# Altium PCB PCB_Design.PcbDoc
Units mil, origin at the board's own origin, x right, y up, seen from the top; angles counter-clockwise.
Board outline 2400 x 690 mil, 2 copper layers (Top Layer, Bottom Layer); 17 components, 10 nets, 36 pads, 0 vias.
Unrouted connection lines stored in the file: 17.
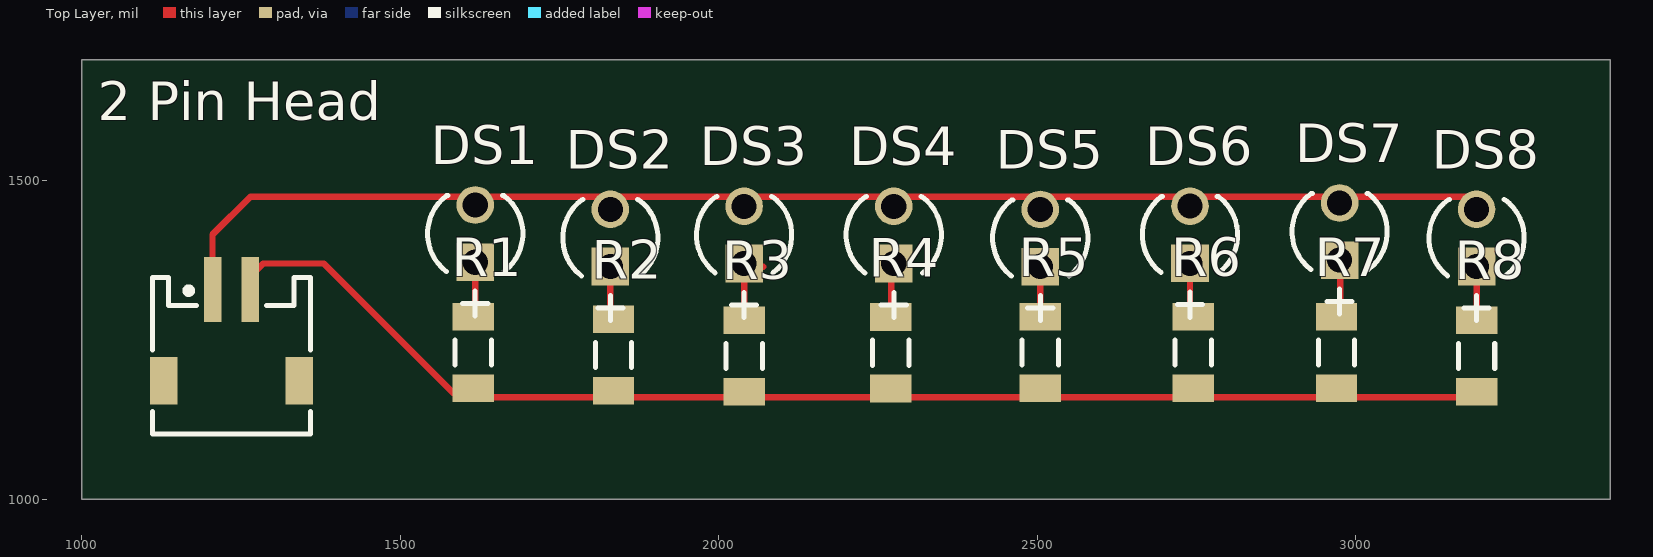
[diagram p0: Top Layer view]
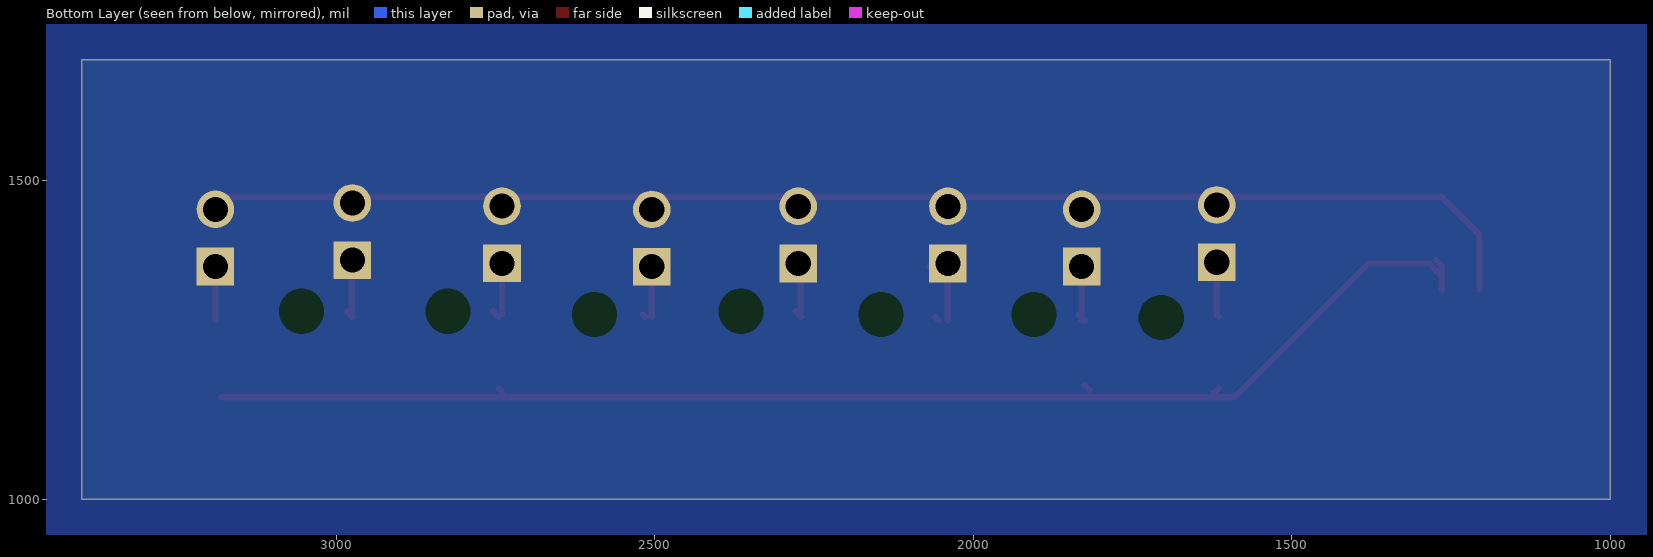
[diagram p1: Bottom Layer view, seen from below]

## Layer stack, top to bottom
Top Solder: solder mask 0.4, Solder Resist, Dk 3.5
Top Layer: signal copper 1.4
Dielectric 1: dielectric 12.6, FR-4, Dk 4.8
Bottom Layer: signal copper 1.4
Bottom Solder: solder mask 0.4, Solder Resist, Dk 3.5

## Board outline
1000,1000 3400,1000 3400,1690 1000,1690

## Design rules (kind name [scope] priority, off if disabled: settings)
Clearance [All] p1: gap=10 ignorepadtopadclearanceinfootprint=FALSE except(0: Arc-Hole Track-Hole SMDPad-Hole THPad-Hole Via-Hole Fill-Hole Poly-Hole Region-Hole Text-Hole)
PolygonConnect [All] p1: connectstyle=Relief reliefconductorwidth=10 reliefentries=4 polygonreliefangle="90 Angle" airgapwidth=10
RoutingVias [All] p1: holewidth=28 width=50 viastyle="Through Hole" minholewidth=28 minwidth=50 maxholewidth=28 maxwidth=50
SolderMaskExpansion [All] p1: expansion=4 istentingtop=FALSE
Width [All] p1: maxlimit=10 minlimit=10 preferedwidth=10
30 further rules are at their usual default settings.

## Classes and differential pairs
component class BrakeLight_Schematic: "2 Pin Head" DS8 R8

## Components (designator, comment, footprint, x,y, rotation, side; value= is the part's Value field where it differs from the comment)
"2 Pin Head" "648102131822" 648102131822 1235,1225 r0 top
DS1 "304090041.0" LED-2P-2.28-3MM_A 1617.88,1416.86 r90 top
DS2 "304090041.0" LED-2P-2.28-3MM_A 1830,1410.12 r90 top
DS3 "304090041.0" LED-2P-2.28-3MM_A 2040,1414.88 r90 top
DS4 "304090041.0" LED-2P-2.28-3MM_A 2275,1414.88 r90 top
DS5 "304090041.0" LED-2P-2.28-3MM_A 2505,1410 r90 top
DS6 "304090041.0" LED-2P-2.28-3MM_A 2740,1415.12 r90 top
DS7 "304090041.0" LED-2P-2.28-3MM_A 2975,1420.12 r90 top
DS8 "304090041.0" LED-2P-2.28-3MM_A 3190,1410.12 r90 top
R1 "ERJ-8GEY0R00V" RESC3216X70X50NL05T20 1615,1230 r270 top
R2 "ERJ-8GEY0R00V" RESC3216X70X50NL05T20 1835,1226.1 r270 top
R3 "ERJ-8GEY0R00V" RESC3216X70X50NL05T20 2040,1225 r270 top
R4 "ERJ-8GEY0R00V" RESC3216X70X50NL05T20 2270,1229.88 r270 top
R5 "ERJ-8GEY0R00V" RESC3216X70X50NL05T20 2505,1230 r270 top
R6 "ERJ-8GEY0R00V" RESC3216X70X50NL05T20 2745,1230 r270 top
R7 "ERJ-8GEY0R00V" RESC3216X70X50NL05T20 2970,1230 r270 top
R8 "ERJ-8GEY0R00V" RESC3216X70X50NL05T20 3190,1225 r270 top

## Footprints (in the part's own frame and the unit in brackets; to place one, negate y for a bottom-side part, rotate by r counter-clockwise, add the part's x,y. Pads: shape width x height; smd on the part's side, far side on the other; paste and mask are expansions set on the pad)
648102131822 [mm] "1.50mm SMT Male Horizontal Shrouded Header, 2p"
  rect 0.7x2.6 smd: 1(-0.75,2.65) 2(0.75,2.65)
  rect 1.1x1.9 smd: MP1(-2.7,-1) MP2(2.7,-1)
  silkscreen extent -3.15,-3.13 3.15,3.13, body extent -3.1,-3 3.1,3.47, height 3.74
LED-2P-2.28-3MM_A [mm] "LED, 2-Leads, Dia 3mm, Pitch 2.28mm"
  rect 1.5x1.5 hole 1: 1(-1.14,0)
  round 1.5 hole 1: 2(1.14,0)
  silkscreen extent -3.29,-1.9 1.52,1.9, body extent -1.9,-1.91 1.52,1.91, height 5.3
RESC3216X70X50NL05T20 [mm] "Chip Resistor, 2-Leads, Body 3.20x1.60mm, IPC Medium Density"
  rect 1.1x1.65 smd: 1(-1.425,0) 2(1.425,0)
  silkscreen extent -0.5,-0.72 0.5,0.72, body extent -1.63,-0.82 1.62,0.82, height 0.7

## Part data
"2 Pin Head": library part CMP-1502-00730-2, Color="Beige, White", Contact Resistance=20mΩ, Current Rating=1A, Flammability Rating="UL94 V-0", Insulation Resistance=500MΩ, Max Operating Temperature=85°C, Min Operating Temperature=-25°C, Operating Supply Voltage=50V, Connector Type="Male Pin", Contact Gender=Male, Contact Material=Copper, Contact Plating=Tin, Gender=Male, Height=3.7mm, Housing Material=Nylon, Insulation=Insulated, Lead Pitch=1.5mm, Length=6mm, Mount="Surface Mount", NexarPartId=18818251, Number of Contacts=2, Number of Pins=2, Number of Positions=2, Number of Rows=1, Packaging="Tape and Reel", Pitch=1.5mm, REACH SVHC=Unknown, RoHS=Compliant, Termination=SMD/SMT, Voltage Rating=50V, Width=6mm
DS1 DS2 DS3 DS4 DS5 DS6 DS7 DS8: library part CMP-2100-03574-1, "Red LED, 1.9 to 2.4 V, -25 to 85 degC, 2-Pin THD", Manufacturer="Shenzhen CGX", Package Description="2-Pin Through Hole Device, Dia 3 mm, Pitch 2.28 mm", Datasheet URL=http://datasheet.octopart.com/304090041-Chengguangxing-datasheet-62330656.pdf, Datasheet Version=41883.0, Manufacturer URL=http://szcgx.com/, Package Reference=304090041.0
R1 R2 R3 R4 R5 R6 R7 R8: library part CMP-2003-00541-1, Manufacturer=Panasonic, Part Number=ERJ-8GEY0R00V

## Nets (pads, with @x,y where several pads share a name; then routed paths per layer and width w, separated by ;. In a path a pad name is that pad's centre, name@x,y a point inside that pad or via, vN(x,y) a via of type N, cw(c..) or ccw(c..) an arc to the next point about the centre after c; other vN are vias at no path point)
GND: "2 Pin Head.1" DS1.2 DS2.2 DS3.2 DS4.2 DS5.2 DS6.2 DS7.2 DS8.2 | length 51.5
  Top Layer w10: 1205.47,1329.33 1205.47,1366.73 ; DS5.2@2500,1459.88 DS5.2 ; DS6.2 DS6.2@2745,1465
"Net2 Pin Head_2": "2 Pin Head.2" R1.2 R2.2 R3.2 R4.2 R5.2 R6.2 R7.2 R8.2 | length 80
  Top Layer w10: 1264.53,1329.33 1264.53,1366.22 1273.31,1375 ; R1.2 R1.2@1623.9,1165 ; R2.2@1817.2,1171.1 R2.2@1825,1178.9 ; R6.2@2740,1168.9 R6.2
NetDS1_1: DS1.1 R1.1 | length 4.1
  Top Layer w10: R1.1 R1.1@1617.88,1288.99
NetDS2_1: DS2.1 R2.1
NetDS3_1: DS3.1 R3.1
NetDS4_1: DS4.1 R4.1
NetDS5_1: DS5.1 R5.1
NetDS6_1: DS6.1 R6.1
NetDS7_1: DS7.1 R7.1
NetDS8_1: DS8.1 R8.1
pads on no net: "2 Pin Head.MP1" "2 Pin Head.MP2"
copper on no net: | length 4933.3
  Top Layer w10: 1205.47,1366.73 1205.47,1415.47 1265,1475 3180,1475 ; 1264.53,1347.77 1264.53,1349.53 1285,1370 1380,1370 1590,1160 3181.1,1160 ; 1617.88,1288.99 1617.88,1371.98 ; 1815,1386.83 1829.85,1371.98 1825.92,1371.98 ; 1825,1280 1835,1290 ; 1830,1281.1 1830,1365.24 ; 2055,1281.1 2059.7,1285.8 ; 2055.92,1371.98 2062.73,1365.17 2069.83,1365.17 ; 2270,1285.98 2278.9,1294.88 ; 2270.92,1293.97 2270.92,1371.86 2274.85,1371.86 ; 2505,1286.1 2505,1365.12 ; 2515,1286.1 2518.9,1290 ; 2515.92,1371.98 2519.85,1371.98 ; 2740,1291.1 2740,1370.24 ; 2745,1286.1 2753.9,1295 ; 2745.92,1371.98 2749.85,1371.98 ; 2975,1286.1 2983.9,1295 ; 2975.92,1287.02 2975.92,1371.98 2979.85,1371.98 ; 3190,1281.1 3190,1365.24 ; 2040,1281.1 2040,1370 2040,1281.1

## Polygon pours and split planes (outlines as drawn)
GND on Bottom Layer "GND_L02_P000" (solid, pour order 0): 290,5515 530,5275 530,820 7155,820 7540,1205 7540,5440